# Altium PCB TPCapTH.PcbDoc
Units mm, origin at the board's own origin, x right, y up, seen from the top; angles counter-clockwise.
Board outline 60 x 25 mm, 2 copper layers (Top Layer, Bottom Layer); 3 components, 5 nets, 12 pads, 0 vias.
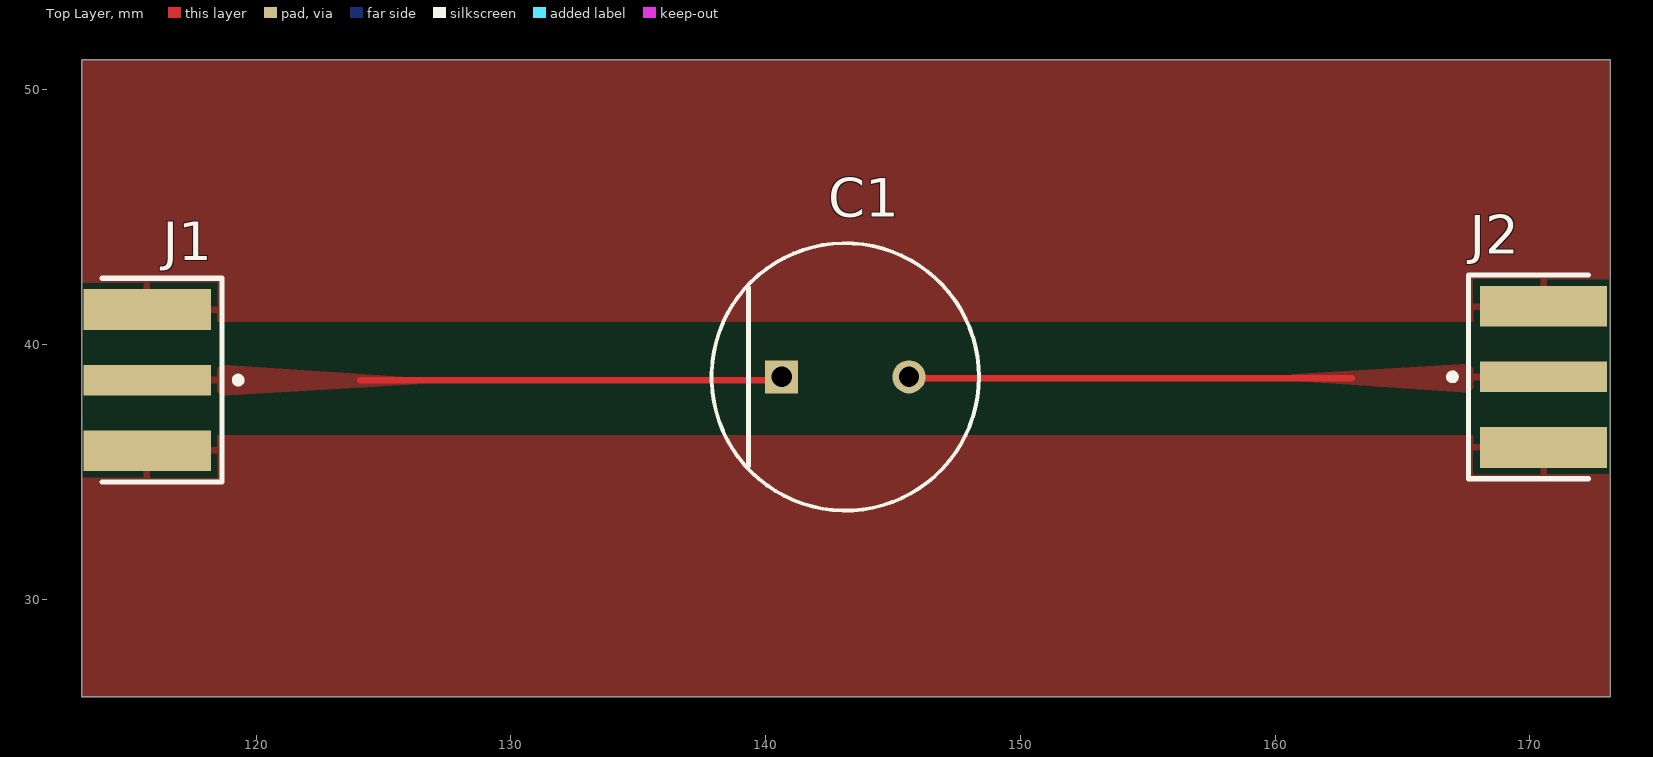
[diagram p0: Top Layer view]
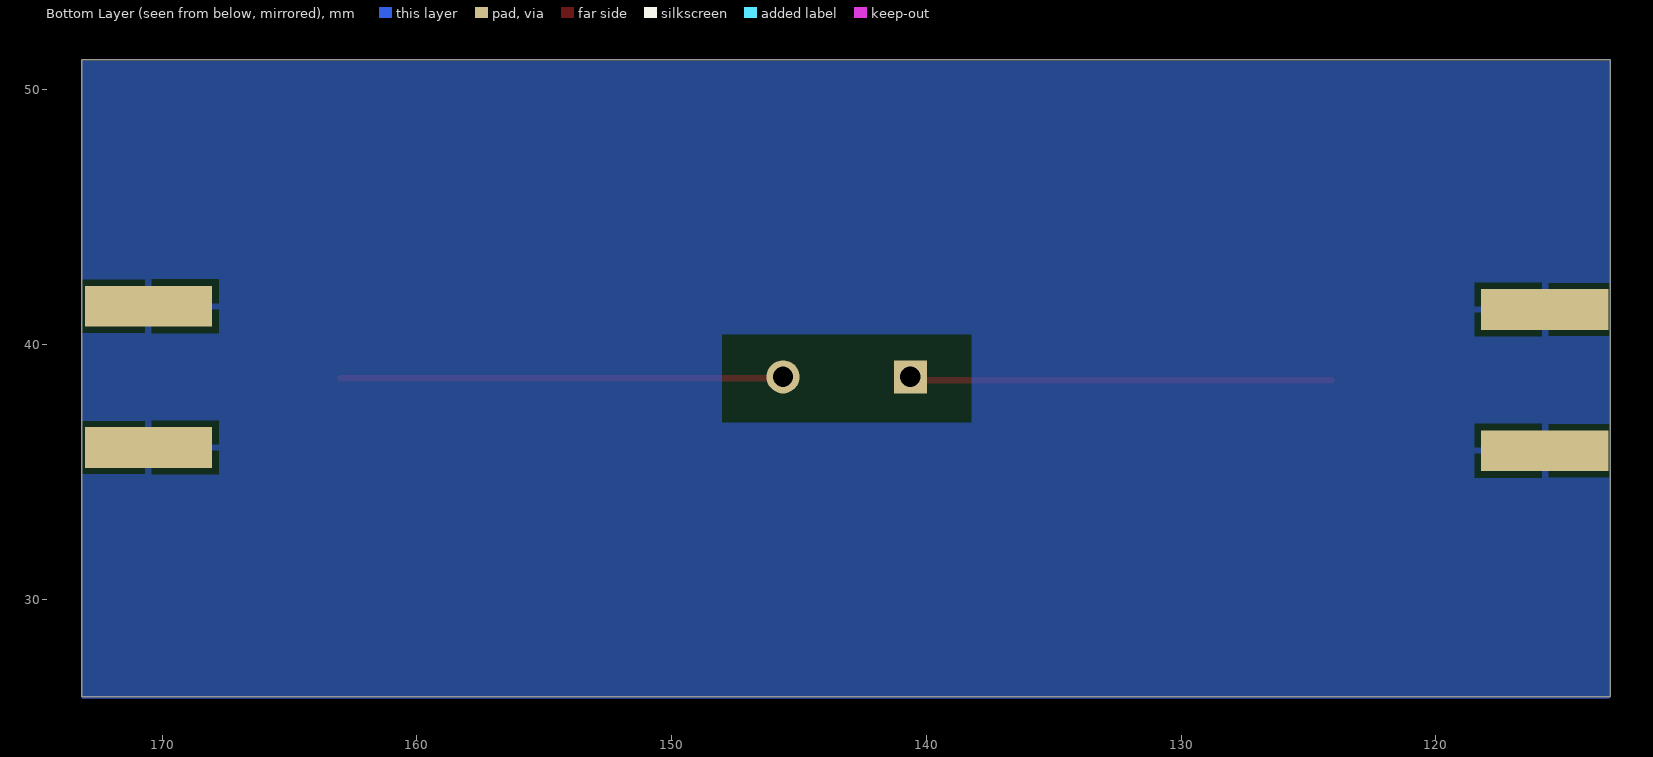
[diagram p1: Bottom Layer view, seen from below]
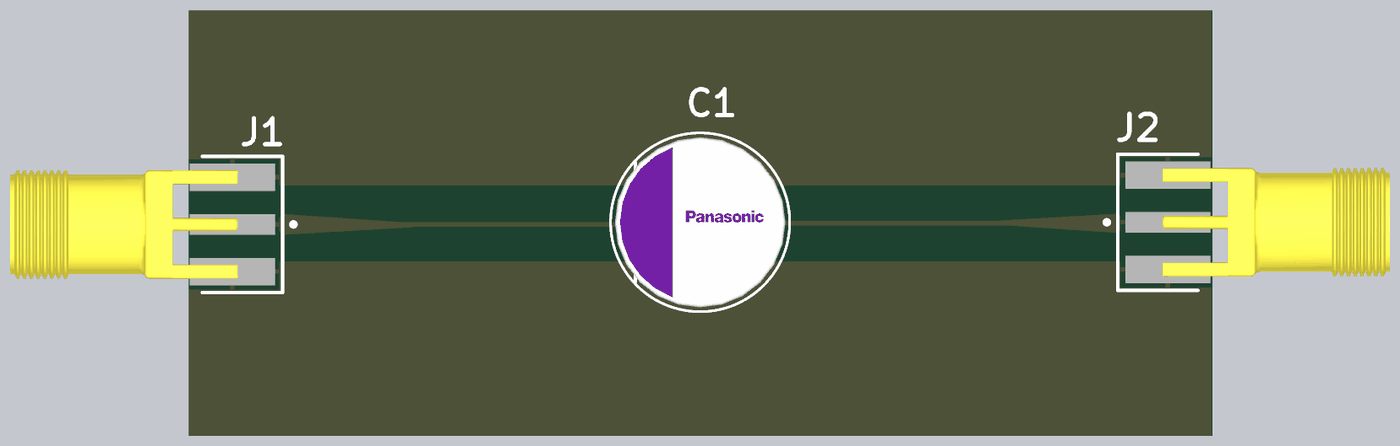
[diagram p2: 3D render of the assembled board from above, using the file's embedded part models]

## Layer stack, top to bottom
Top Solder: solder mask 0.0102, Solder Resist, Dk 3.5
Top Layer: signal copper 0.0356
Dielectric 1: dielectric 0.32, FR-4, Dk 4.8
Bottom Layer: signal copper 0.0356
Bottom Solder: solder mask 0.0102, Solder Resist, Dk 3.5

## Board outline
113.157,26.181 113.157,51.181 173.157,51.181 173.157,26.181

## Design rules (kind name [scope] priority, off if disabled: settings)
Clearance [All] p1: gap=0.254 ignorepadtopadclearanceinfootprint=FALSE
PolygonConnect [All] p1: connectstyle=Relief reliefconductorwidth=0.254 reliefentries=4 polygonreliefangle="90 Angle" airgapwidth=0.254
RoutingVias [All] p1: holewidth=0.711 width=1.27 viastyle="Through Hole" minholewidth=0.711 minwidth=1.27 maxholewidth=0.711 maxwidth=1.27
SolderMaskExpansion [All] p1: expansion=0 istentingtop=FALSE
Width [All] p1: maxlimit=0.254 minlimit=0.254 preferedwidth=0.254
30 further rules are at their usual default settings.

## Components (designator, comment, footprint, x,y, rotation, side; value= is the part's Value field where it differs from the comment)
C1 "20SEQP150M" FP-OS-CON-TH-F13-d_0_6-MFG 143.129,38.735 r0 top
J1 "CON-SMA-EDGE-S" FP-CON-SMA-EDGE-S-MFG 108.458,38.608 r90 top
J2 "CON-SMA-EDGE-S" FP-CON-SMA-EDGE-S-MFG 177.8,38.735 r270 top

## Footprints (in the part's own frame and the unit in brackets; to place one, negate y for a bottom-side part, rotate by r counter-clockwise, add the part's x,y. Pads: shape width x height; smd on the part's side, far side on the other; paste and mask are expansions set on the pad)
FP-CON-SMA-EDGE-S-MFG [mm]
  rect 1.2x5 smd paste+0 mask+0: 1(0,-7.26)
  rect 1.6x5 smd paste+0 mask+0: 2(-2.77,-7.26) 3(2.77,-7.26)
  rect 1.6x5 smd far side paste+0 mask+0: 4(-2.77,-7.26) 5(2.77,-7.26)
  silkscreen extent -4,-10.96 4,-5.5, body extent -3.67,-9.86 3.67,4.86, height 0.25
FP-OS-CON-TH-F13-d_0_6-MFG [mm]
  rect 1.3x1.3 hole 0.8 paste-2539.97 mask+0: 1(-2.5,0)
  round 1.3 hole 0.8 paste-2539.97 mask+0: 2(2.5,0)
  silkscreen extent -5.25,-5.25 5.25,5.25, body extent -5.35,-5.35 5.35,5.35, height 0.25

## Part data
C1: library part CMP-05428-000819-1, "Conductive Polymer Aluminum Solid Capacitors (OS-CON) 150uF ±20% 20V RADIAL TH 10x13mm", Capacitance=150uF, Case/Package=Radial, ESR (Equivalent Series Resistance)=20mR, Max Operating Temperature=125°C, Min Operating Temperature=-55°C, Package Quantity=200, Ripple Current=4.32A, Tolerance=20%, Voltage Rating=20V, Diameter=10mm, Dissipation Factor=15%, Height - Seated (Max)=0.512inch, Lead Free="Lead Free", Lead Pitch=0.197inch, Length=13mm, Life (Hours)=1000Hour, Mount="Through Hole", Packaging=Bulk, Polarity=Polar, REACH SVHC="No SVHC", RoHS Compliant=Yes, Series="OS-CON™, SEQP", Termination=Radial, Voltage Rating (DC)=20V
J1 J2: library part CMP-204357-000001-1, "CONN SMA JACK STR EDGE MNT", Frequency=18GHz, Manufacturer="RF Solutions Ltd.", Package=CONN_JACK, Automotive=No, Category=Conn, ComponentLink2Description=Datasheet, ComponentLink2URL=https://www.rfsolutions.co.uk/downloads/1498648656DS-CON-EDGE-SMA-4.pdf, Conn Orientation="Right Angle", Contact Material=Gold, Device Class L1=Connectors, Device Class L2="RF / Coaxial Connectors", Device Class L3=unset, Digikey Description="CONN SMA JACK STR EDGE MNT", Footprint Url=https://forum.upverter.com/uploads/default/original/3X/b/e/be75b907af57498775929d6d9099689c472e0307.pdf, Height=6.35mm, Impedance=50Ω, Is Female=yes, Lead Free=Yes, Manufacturer Part Number=CON-SMA-EDGE-S, Number of Contacts=1, Octopart=https://octopart.com/con-sma-edge-s-rf+solutions-70967450, RoHS=TRUE, Shielding=true

## Nets (pads, with @x,y where several pads share a name; then routed paths per layer and width w, separated by ;. In a path a pad name is that pad's centre, name@x,y a point inside that pad or via, vN(x,y) a via of type N, cw(c..) or ccw(c..) an arc to the next point about the centre after c; other vN are vias at no path point)
GND: J1.4 J1.5 J2.4 J2.5
GND1: J1.2 J2.3
GND2: J1.3 J2.2
NetC1_1: C1.1 J1.1 | length 16.7
  Top Layer w0.254: 124.079,38.608 140.657,38.608 C1.1@140.657,38.681
NetC1_2: C1.2 J2.1 | length 17.4
  Top Layer w0.254: C1.2@145.657,38.681 163.014,38.681

## Polygon pours and split planes (outlines as drawn)
GND on Bottom Layer "GND_L02_P000" (solid, pour order 0): 113.201,51.123 113.201,26.104 173.145,26.104 173.145,51.123
NetC1_2 on Top Layer "NETC1_2_L01_P004" (solid, pour order 4): 171.206,37.866 158.641,38.719 171.206,39.451
NetC1_1 on Top Layer "NETC1_1_L01_P003" (solid, pour order 3): 115.765,39.416 128.329,38.562 115.765,37.831
GND1 on Top Layer "GND1_L01_P002" (solid, pour order 2): 113.157,36.449 113.157,26.162 173.101,26.162 173.101,36.449
GND2 on Top Layer "GND2_L01_P001" (solid, pour order 1): 113.157,51.181 113.157,40.894 173.101,40.894 173.101,51.181

## Other copper
Bottom Layer:
  pour cut-out: 138.239,36.957 138.239,40.386 148.018,40.386 148.018,36.957